# Altium PCB v4.2.1 Embutida.PcbDoc
Units mm, origin at the board's own origin, x right, y up, seen from the top; angles counter-clockwise.
Board outline 100.32 x 66.7 mm, 2 copper layers (Top, Bottom); 36 components, 28 nets, 130 pads, 0 vias.
Unrouted connection lines stored in the file: 83.
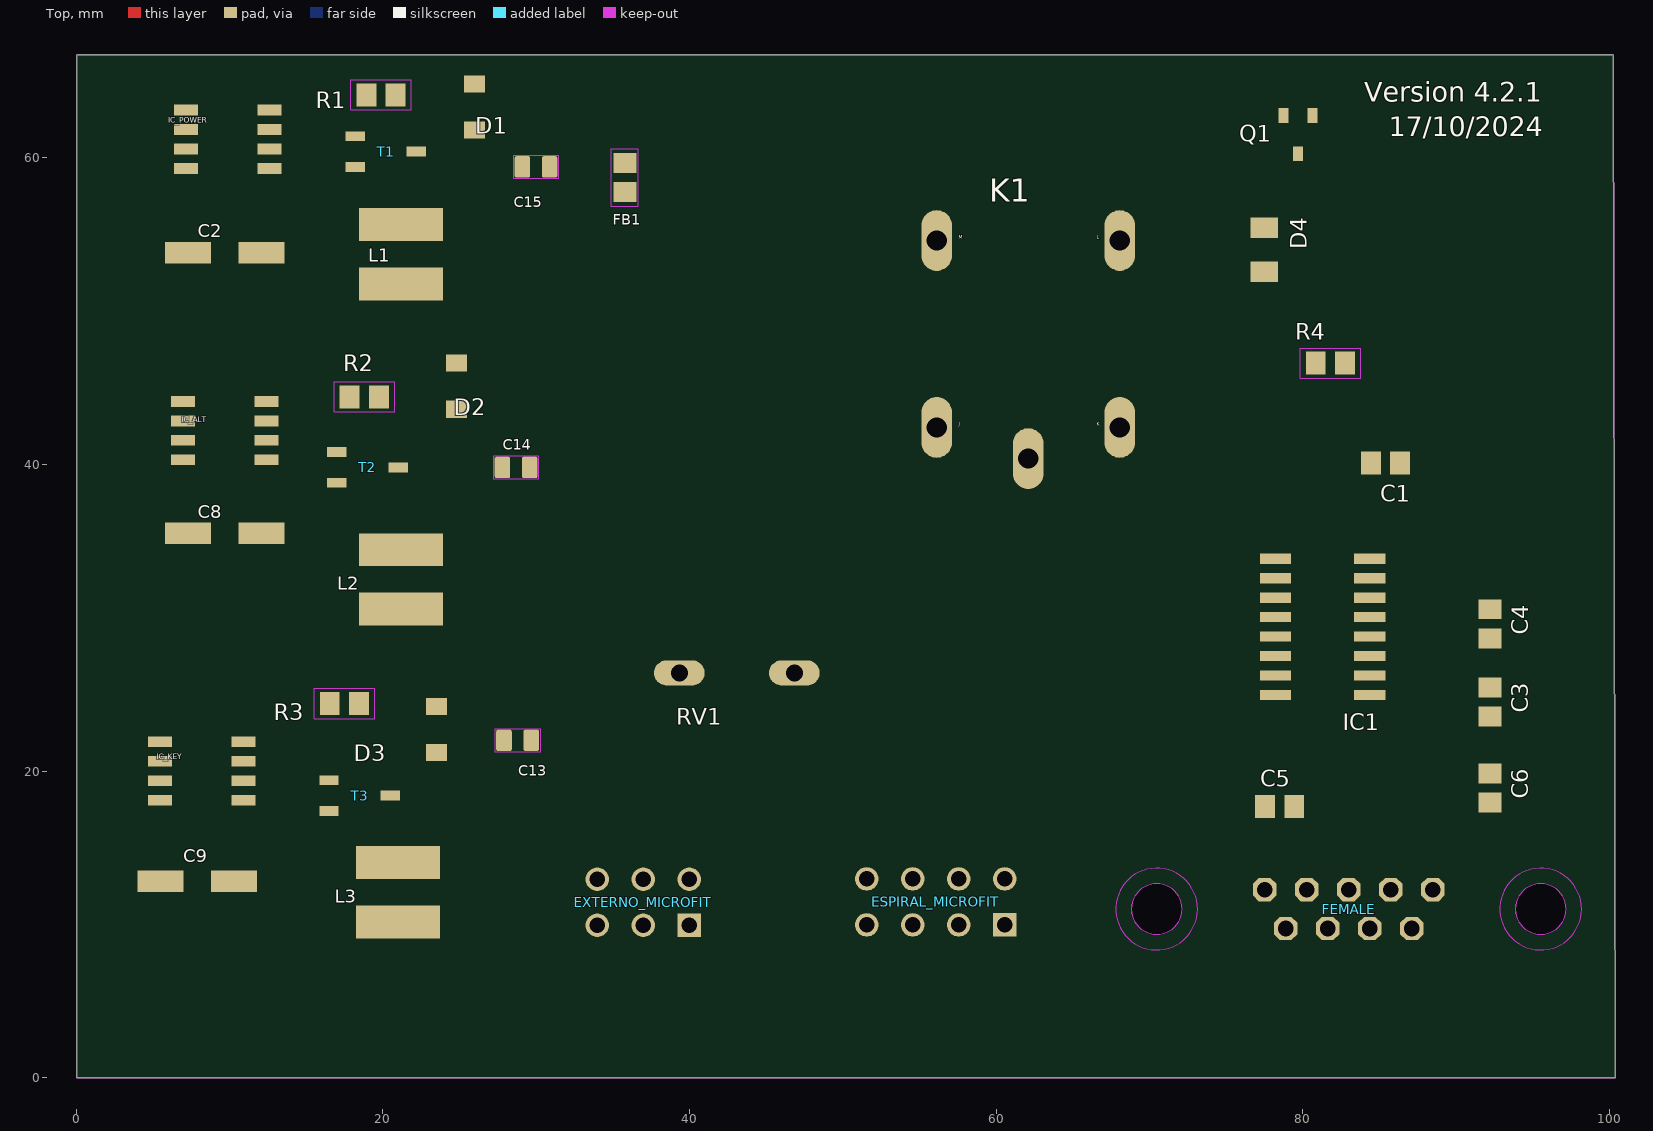
[diagram p0: Top view]
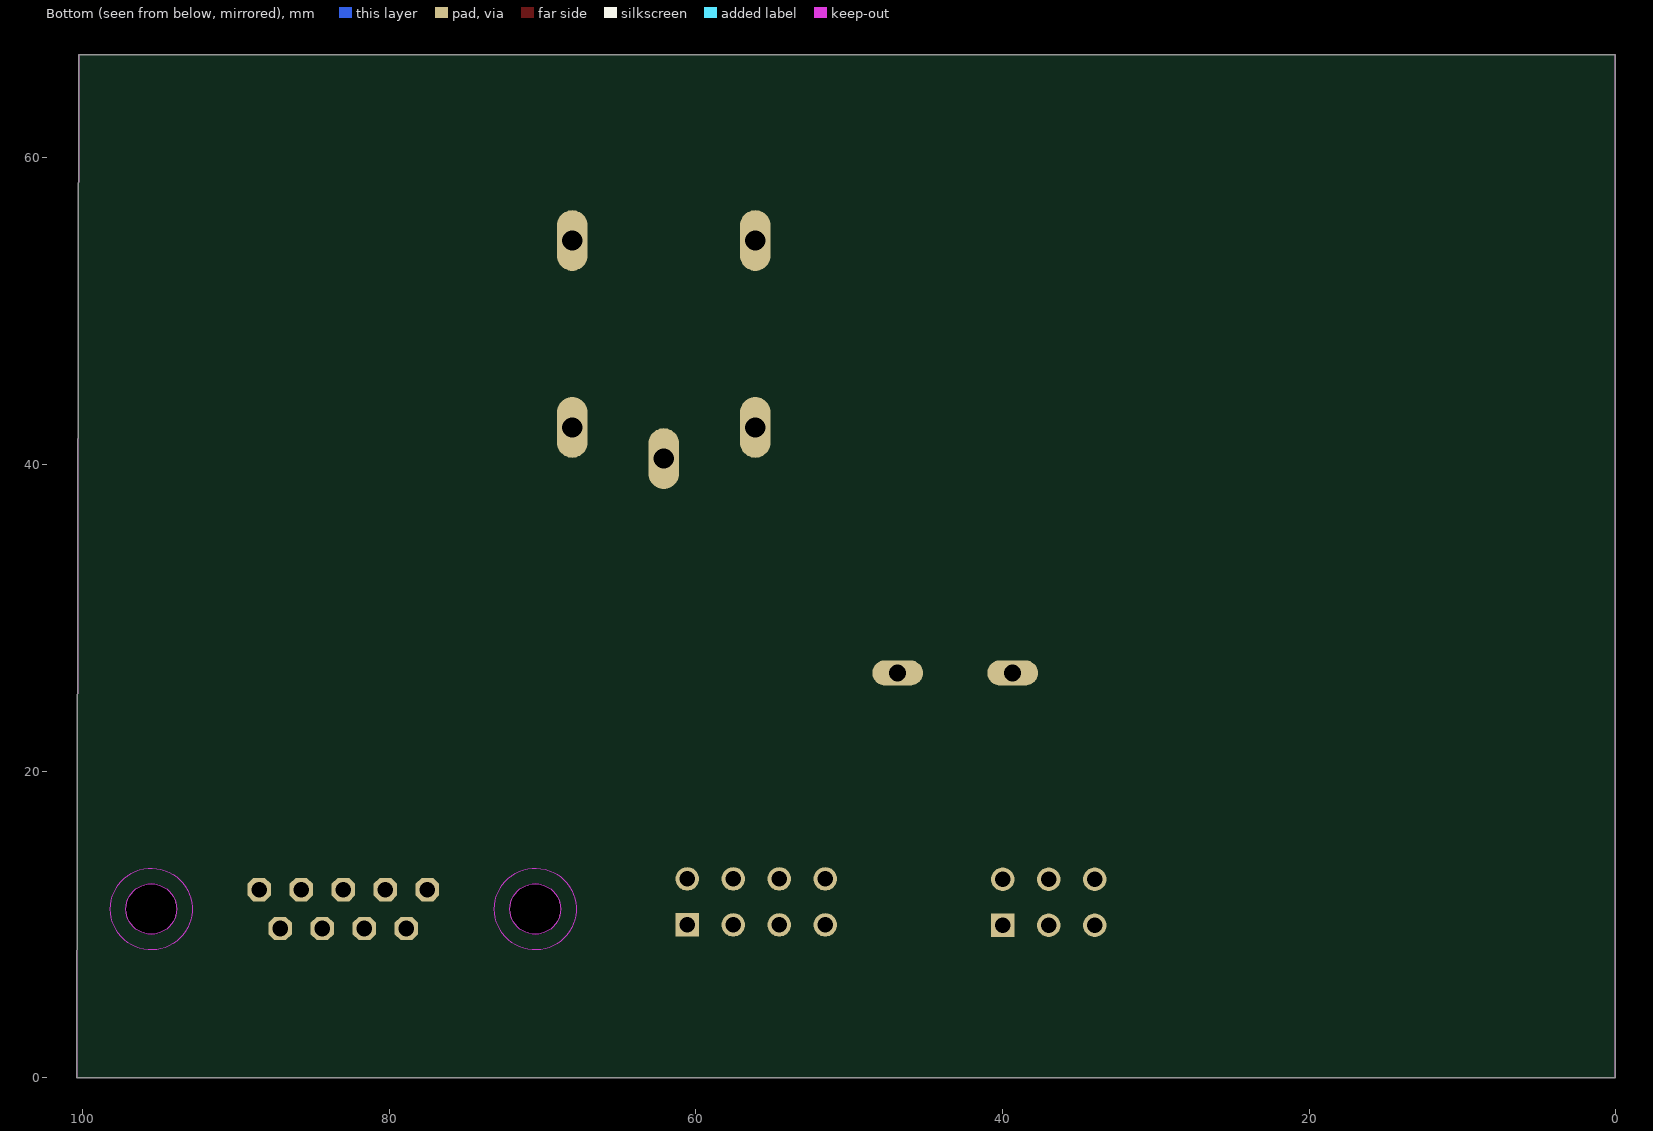
[diagram p1: Bottom view, seen from below]

## Layer stack, top to bottom
Top Solder: solder mask 0.0102, Solder Resist, Dk 3.5
Top: signal copper 0.035
Dielectric 1: dielectric 0.32, FR-4, Dk 4.8
Bottom: signal copper 0.035
Bottom Solder: solder mask 0.0102, Solder Resist, Dk 3.5

## Board outline
0.056,66.706 0.056,0.006 100.376,0.006 100.256,66.706
cut-out: 70.478,9.349 ccw(c70.478,11) 72.129,11 ccw(c70.478,11) 70.478,12.651 ccw(c70.478,11) 68.827,11 ccw(c70.478,11)
cut-out: 95.522,9.349 ccw(c95.522,11) 97.173,11 ccw(c95.522,11) 95.522,12.651 ccw(c95.522,11) 93.871,11 ccw(c95.522,11)

## Design rules (kind name [scope] priority, off if disabled: settings)
BoardOutlineClearance mdCopperDimension [All] p1: gap=0.254 ignorepadtopadclearanceinfootprint=FALSE except(0: Arc-SplitContinuation Track-SplitContinuation SMDPad-SplitContinuation THPad-SplitContinuation Via-SplitContinuation Fill-SplitContinuation Poly-SplitContinuation Region-SplitContinuation Text-SplitContinuation; 1.016: Poly-OutlineEdge Poly-CavityEdge Poly-CutoutEdge Poly-SplitBarrior)
Clearance "Clearance (Same Net)" [All] p1: gap=0.152 ignorepadtopadclearanceinfootprint=FALSE
Clearance [All] p2: gap=0.152 ignorepadtopadclearanceinfootprint=FALSE
HoleSize "HoleSize_For_NetClass_New Class" [InNetClass('New Class')] p1: absolutevalues=TRUE maxlimit=1 minlimit=1 maxpercent=80.000 minpercent=20.000
HoleSize [All] p2: absolutevalues=TRUE maxlimit=2540 minlimit=0.35 maxpercent=80.000 minpercent=20.000
HoleToHoleClearance mdDrill [All] p1: gap=0.152 allowstackedmicrovias=TRUE
MinimumSolderMaskSliver [All] p1 off: minsoldermaskwidth=0.254
PasteMaskExpansion mlMinCreamFrame [All] p1: expansion=0
PolygonConnect ThermalVias [IsVia] p1: connectstyle=Direct reliefconductorwidth=0.254 reliefentries=4 polygonreliefangle="90 Angle" airgapwidth=0.254
PolygonConnect [All] p2: connectstyle=Relief reliefconductorwidth=0.254 reliefentries=4 polygonreliefangle="90 Angle" airgapwidth=0.254
RoutingVias [All] p1: holewidth=0.35 width=0.756 viastyle="Through Hole" minholewidth=0.35 minwidth=0.756 maxholewidth=2.54 maxwidth=2.54
SolderMaskExpansion mlMinStopFrame [All] p1: expansion=0.102 istentingtop=FALSE
SupplyNets "Schematic Supply Nets" [InNet('GND')] p1: voltage=0.000
Width "Width_For_NetClass_New Class" [InNetClass('New Class')] p1: maxlimit=1 minlimit=0.254 preferedwidth=0.5
Width [All] p2: maxlimit=0.254 minlimit=0.152 preferedwidth=0.152
26 further rules are at their usual default settings.

## Components (designator, comment, footprint, x,y, rotation, side; value= is the part's Value field where it differs from the comment)
C1 "100n" C0805#1 85.4,40.1 r180 top
C2 "22uF/50v" PANASONIC_D 9.7,53.8 r0 top
C3 "100n" C0805#1 92.2,24.5 r270 top
C4 "100n" C0805#1 92.2,29.6 r270 top
C5 "100n" C0805#1 78.5,17.7 r0 top
C6 "100n" C0805#1 92.2,18.9 r270 top
C8 "22uF/50V" PANASONIC_D 9.7,35.5 r0 top
C9 "22uF/50V" PANASONIC_D 7.9,12.8 r0 top
C13 "10uF/50V" C0805#2 28.8,22 r180 top
C14 "10uF/50V" C0805#2 28.7,39.8 r180 top
C15 "10uF/50V" C0805#2 30,59.4 r180 top
D1 "1N5819HW1-7-F" SODFL3518X115N 26,63.3 r90 top
D2 "1N5819HW1-7-F" SODFL3518X115N 24.8,45.1 r90 top
D3 "1N5819HW1-7-F" SODFL3518X115N 23.5,22.7 r90 top
D4 "S1MFL" SODFL3617X108N 77.5,54 r270 top
ESPIRAL_MICROFIT "HEADER_POS8_?43045-0800" 43045-0800 56.062,5.645 r0 top
EXTERNO_MICROFIT "HEADER_POS6_?43045-0600" 43045-0600 37,5.622 r0 top
FB1 "1A" 0805 35.8,58.7 r270 top
FEMALE "F09H" F09H 83,11 r180 top
IC1 "MAX232" SO16 81.3,29.4 r90 top
IC_ALT "XL1509-3.3E1" SOIC127P600X175-8N 9.7,42.2 r180 top
IC_KEY "XL1509-3.3E1" SOIC127P600X175-8N 8.2,20 r180 top
IC_POWER "XL1509-3.3E1" SOIC127P600X175-8N 9.9,61.2 r180 top
K1 "G5LE" G5LE 62.1,49.9 r90 top
L1 "47uH" SDE0604A-470M 21.2,53.7 r270 top
L2 "47uH" SDE0604A-470M 21.2,32.5 r90 top
L3 "47uH" SDE0604A-470M 21,12.1 r90 top
Q1 "BC847" BC847 79.7,61.5 r270 top
R1 "100" R0805 19.9,64.1 r180 top
R2 "100" R0805 18.8,44.4 r180 top
R3 "100" R0805 17.5,24.4 r180 top
R4 "10k" R0805 81.8,46.6 r0 top
RV1 "MOV-14D471K" MOV14D471K 43.1,26.4 r180 top
T1 "TRIMPOT 10K" TRIMPOT 18.7,61.9 r180 top
T2 "TRIMPOT 10K" TRIMPOT 17.5,41.3 r180 top
T3 "TRIMPOT 10K" TRIMPOT 17,19.9 r180 top

## Footprints (in the part's own frame and the unit in brackets; to place one, negate y for a bottom-side part, rotate by r counter-clockwise, add the part's x,y. Pads: shape width x height; smd on the part's side, far side on the other; paste and mask are expansions set on the pad)
0805 [mm] "0805"
  rect 1.3x1.5 smd: 1(-0.95,0) 2(0.95,0)
  Top keep-out lines w0.051: 1.873,-0.883 -1.873,-0.883 -1.873,0.883 1.873,0.883 1.873,-0.883
43045-0600 [mm] "43045-0600"
  rect 1.53x1.53 / inner round 1.414 / far side rect 1.53x1.53 hole 1.02: P$1(3,4.32)
  round 1.53 hole 1.02: P$2(0,4.32) P$3(-3,4.32) P$4(3,7.32) P$5(0,7.32) P$6(-3,7.32)
43045-0800 [mm] "43045-0800"
  rect 1.53x1.53 / inner round 1.414 / far side rect 1.53x1.53 hole 1.02: P$1(4.5,4.32)
  round 1.53 hole 1.02: P$2(1.5,4.32) P$3(-1.5,4.32) P$4(-4.5,4.32) P$5(4.5,7.32) P$6(1.5,7.32) P$7(-1.5,7.32) P$8(-4.5,7.32)
BC847 [mm] "BC847"
  rect 0.95x0.65 smd: 1(-1.25,-0.95) 2(-1.25,0.95) 3(1.25,0)
C0805#1 [mm] "C0805"
  rect 1.3x1.5 smd: 1(-0.95,0) 2(0.95,0)
C0805#2 [mm] "C0805"
  rrect25% 1.016x1.397 smd: 1(-0.889,0) 2(0.889,0)
  Top keep-out region: -1.46,-0.762 -1.461,0.762 1.46,0.762 1.461,-0.762
F09H [mil] "F09H"
  oct 60x60 / inner round 55.43 / far side oct 60x60 hole 40: 1(-216,-50) 2(-108,-50) 3(0,-50) 4(108,-50) 5(216,-50) 6(-162,50) 7(-54,50) 8(54,50) 9(162,50)
  Top keep-out circle w0: c-493,0 r105
  Top keep-out circle w0: c493,0 r105
  Bottom keep-out circle w0: c-493,0 r105
  Bottom keep-out circle w0: c493,0 r105
G5LE [mil] "G5LE"
  oval 156x78 hole 52: 1(-295,-235) 2(-295,235) O(185,235) P(-375,0) S(185,-235)
MOV14D471K [mm] "MOV14D471K"
  oval 3.3x1.65 hole 1.1: 1(-3.75,0) 2(3.75,0)
PANASONIC_D [mm] "PANASONIC_D"
  rect 3x1.4 smd: +(2.4,0) -(-2.4,0)
R0805 [mm] "R0805"
  rect 1.3x1.5 smd: 1(-0.95,0) 2(0.95,0)
  Top keep-out lines w0.051: 1.973,0.983 -1.973,0.983 -1.973,-0.983 1.973,-0.983 1.973,0.983
SDE0604A-470M [mm] "SDE0604A-470M"
  rect 2.15x5.5 smd: 1(-1.931,0) 2(1.931,0)
SO16 [mil] "SO16"
  rect 26x80 smd: 1(-175,-121) 2(-125,-121) 3(-75,-121) 4(-25,-121) 5(25,-121) 6(75,-121) 7(125,-121) 8(175,-121) 9(175,121) 10(125,121) 11(75,121) 12(25,121) 13(-25,121) 14(-75,121) 15(-125,121) 16(-175,121)
SODFL3518X115N [mm] "SODFL3518X115N"
  rect 1.12x1.37 smd: 1(-1.5,0) 2(1.5,0)
SODFL3617X108N [mm] "SODFL3617X108N"
  rect 1.34x1.8 smd: A(1.43,0) C(-1.43,0)
SOIC127P600X175-8N [mm] "SOIC127P600X175-8N"
  rect 1.55x0.7 smd: 1(-2.725,1.905) 2(-2.725,0.635) 3(-2.725,-0.635) 4(-2.725,-1.905) 5(2.725,-1.905) 6(2.725,-0.635) 7(2.725,0.635) 8(2.725,1.905)
TRIMPOT [mm] "TRIMPOT"
  rect 1.27x0.635 smd: OUT(0.5,0.5) VCC1(-3.5,1.5) VCC2(0.5,2.5)

## Part data
C1 C3 C4 C5 C6: library part C-EUC0805, "CAPACITOR, European symbol", MPN=C0805C104K8RACAUTO, DeviceName=C0805, DeviceSetName=C-EU, GateName_1=G$1, LibraryName=rcl@1, POPULARITY=88, SPICEPREFIX=C, SymbolName_1=C-EU
C2 C8 C9: library part CPOL-EUD, "POLARIZED CAPACITOR, European symbol", MPN=EEH-ZA1H220P, +=+, DeviceName=D, DeviceSetName=CPOL-EU, GateName_1=G$1, LibraryName=rcl, POPULARITY=16, SPICEPREFIX=C, SymbolName_1=CPOL
C13 C14 C15: library part C*-0805, "Ceramic Capacitors", MPN=C2012X5R1H106K125AC, DeviceName=-0805, DeviceSetName=C*, GateName_1=C, LibraryName=discrete, SymbolName_1=C
D1 D2 D3: "1N5819 Schottky Diode 40V 1A SOD123F   Source:  Datasheet", Manufacturer_Name="Diodes Inc.", MPN="1N5822 SS34", ARROW_PART_NUMBER=1N5819HW1-7-F, ARROW_PRICE-STOCK=https://www.arrow.com/en/products/1n5819hw1-7-f/diodes-incorporated?region=nac, DeviceSetName=1N5819HW1-7-F, GateName_1=G$1, Height=1.15mm, LibraryName=1N5819HW1-7-F, Manufacturer_Part_Number=1N5819HW1-7-F, MOUSER_PART_NUMBER=621-1N5819HW1-7-F, MOUSER_PRICE-STOCK=https://www.mouser.co.uk/ProductDetail/Diodes-Incorporated/1N5819HW1-7-F?qs=60RJRzIpcl9ACQG7Zn63jQ%3D%3D, SymbolName_1=1N5819HW1-7-F
D4: "Diode Standard 1000V 1A Surface Mount SOD-123F   Check availability", Package="SOD-123F ON Semiconductor", Availability="In Stock", CHECK_PRICES=https://www.snapeda.com/parts/S1MFL/Onsemi/view-part/?ref=eda, DeviceSetName=S1MFL, GateName_1=G$1, LibraryName=S1MFL, MF=onsemi, MP=S1MFL, Price=None, PURCHASE-URL=https://www.snapeda.com/api/url_track_click_mouser/?unipart_id=7151124&manufacturer=onsemi&part_name=S1MFL&search_term=None, SNAPEDA_LINK=https://www.snapeda.com/parts/S1MFL/Onsemi/view-part/?ref=snap, SymbolName_1=S1MFL
ESPIRAL_MICROFIT: "Molex - Micro-Fit 3.0 Series connector,  3.00mm (0.118\") pitch header, 8 positions.", MPN=43045-0800, DeviceName=43045-0800, DeviceSetName=HEADER_POS8_?, GateName_1=G$1, LibraryName="con-molex-micro-fit-3_0 (1)", SymbolName_1=HEADER_POS8
EXTERNO_MICROFIT: "Molex - Micro-Fit 3.0 Series connector,  3.00mm (0.118\") pitch header, 6 positions.", MPN=43045-0600, DeviceName=43045-0600, DeviceSetName=HEADER_POS6_?, GateName_1=G$1, LibraryName="con-molex-micro-fit-3_0 (1)", SymbolName_1=HEADER_POS6
FB1: library part FERRITE0805, "Ferrite Bead   0603 MMZ1608B121C - 120 Ohm, 600mA Ferrite Chip - Digikey: 445-2164-1-ND  BK1608HW121-T - 120 Ohm, 600mA Ferrite Chip - Digikey: 587-1876-2-ND       0805 HZ0805B272R-10 - 2.7K Ohm @ 100MHz, 200mA 0.8 Ohm DC Resistance - Digikey: 240-2504-1-ND (see also Murata BLM21BD272SN1L)", MPN=BLM21AG121SN1D, DeviceName=0805, DeviceSetName=FERRITE, GateName_1=G$1, LibraryName=microbuilder, SymbolName_1=FERRITE
FEMALE: "SUB-D", MPN="FEMALE DR9", DeviceName=H, DeviceSetName=F09, GateName_1=G$1, LibraryName=con-subd, MF=MF, OC_FARNELL=unknown, OC_NEWARK=unknown, POPULARITY=0, SymbolName_1=F09
IC1: library part MAX232ECWES, "RS232 TRANSEIVER", MPN=MAX3232CSE+, DeviceName=S, DeviceSetName=MAX232ECWE, GateName_1=G$1, GateName_2=P, GND=GND, LibraryName=maxim-6b, SymbolName_1=MAX232, SymbolName_2=VCC-GND, VCC=VCC
IC_ALT IC_KEY IC_POWER: "40V 2A SOP-8_150mil DC-DC Converters RoHS   Source:  Datasheet", Manufacturer_Name=XLSEMI, MPN=XL1509-ADJE1, ARROW_PART_NUMBER=ARROW_PART_NUMBER, ARROW_PRICE-STOCK=ARROW_PRICE-STOCK, DeviceSetName=XL1509-3.3E1, GateName_1=G$1, Height=1.75mm, LibraryName=XL1509-3.3E1, Manufacturer_Part_Number=XL1509-3.3E1, MOUSER_PART_NUMBER=MOUSER_PART_NUMBER, MOUSER_PRICE-STOCK=MOUSER_PRICE-STOCK, SymbolName_1=XL1509-3.3E1
K1: "RELAY   1 x switch, 10 A/120 V AC, 8 A/30 V DC, Omron", Manufacturer=MANUFACTURER, MPN=MPN, DeviceSetName=G5LE, GateName_1=1, GateName_2=2, LibraryName=relay, PART=K1, PART_STATUS=PART_STATUS, POPULARITY=13, SymbolName_1=K, SymbolName_2=U
L1 L2 L3: library part INDUCTOR, "A very specific inductor", MPN=SDE0604A-470M, DeviceSetName=INDUCTOR, GateName_1=G$1, LibraryName=passives, SymbolName_1=INDUCTOR
Q1: "Epitaxial Planar NPN transistor   Source:  Datasheet", Manufacturer_Name=KEC, ARROW_PART_NUMBER=ARROW_PART_NUMBER, ARROW_PRICE-STOCK=ARROW_PRICE-STOCK, DeviceSetName=BC847, GateName_1=G$1, Height=1.3mm, LibraryName=BC847, Manufacturer_Part_Number=BC847, MOUSER_PART_NUMBER=MOUSER_PART_NUMBER, MOUSER_PRICE-STOCK=MOUSER_PRICE-STOCK, SymbolName_1=BC847
R1 R2 R3 R4: library part R-EU_R0805, "RESISTOR, European symbol", MPN=RA73F2A100RBTDF, DeviceName=R0805, DeviceSetName=R-EU_, GateName_1=G$1, LibraryName=rcl, POPULARITY=86, SPICEPREFIX=R, SymbolName_1=R-EU
RV1: "Bourns MOV-14D Series Metal Oxide Varistor 430pF 50A, Clamping 775V, Varistor 470V   Source:  Datasheet   Check availability", Package="Disc-14 Bourns", Availability="In Stock", CHECK_PRICES=https://www.snapeda.com/parts/MOV-14D471K/Bourns/view-part/?ref=eda, DeviceSetName=MOV-14D471K, GateName_1=G$1, LibraryName=MOV-14D471K, MF=Bourns, MP=MOV-14D471K, Price=None, SNAPEDA_LINK=https://www.snapeda.com/parts/MOV-14D471K/Bourns/view-part/?ref=snap, SymbolName_1=MOV-14D471K
T1 T2 T3: library part TRIMPOT, MPN=EVM3ESX50B14, DeviceSetName=TRIMPOT, GateName_1=G$1, LibraryName=TRIMPOT, SymbolName_1=TRIMPOT

## Free pads (board coordinates)
  round 3.302 hole 3.302 unplated: MH1(95.522,11) MH2(70.478,11)

## Nets (pads, with @x,y where several pads share a name; then routed paths per layer and width w, separated by ;. In a path a pad name is that pad's centre, name@x,y a point inside that pad or via, vN(x,y) a via of type N, cw(c..) or ccw(c..) an arc to the next point about the centre after c; other vN are vias at no path point)
24V: C2.+ EXTERNO_MICROFIT.P$4 IC_POWER.1 K1.P RV1.2
ALT: C14.2 ESPIRAL_MICROFIT.P$2 L2.1 T2.VCC1 T2.VCC2
ALT_IN: C8.+ EXTERNO_MICROFIT.P$5 IC_ALT.1
COM: ESPIRAL_MICROFIT.P$7 R4.1
GND: C1.2 C2.- C5.1 C8.- C9.- C13.1 C14.1 C15.1 D1.2 D2.2 D3.2 ESPIRAL_MICROFIT.P$4 EXTERNO_MICROFIT.P$3 FEMALE.5 IC1.15 IC_ALT.5 IC_ALT.6 IC_ALT.7 IC_ALT.8 IC_KEY.5 IC_KEY.6 IC_KEY.7 IC_KEY.8 IC_POWER.5 IC_POWER.6 IC_POWER.7 IC_POWER.8 Q1.1 R1.1 R2.1 R3.1 RV1.1
KEY: C13.2 ESPIRAL_MICROFIT.P$5 L3.1 T3.VCC1 T3.VCC2
KEY_IN: C9.+ EXTERNO_MICROFIT.P$6 IC_KEY.1
NetC1_1: C1.1 IC1.6
NetC3_1: C3.1 IC1.3
NetC3_2: C3.2 IC1.1
NetC4_1: C4.1 IC1.5
NetC4_2: C4.2 IC1.4
NetC6_1: C6.1 IC1.2
NetD1_1: D1.1 IC_POWER.2 L1.2
NetD2_1: D2.1 IC_ALT.2 L2.2
NetD3_1: D3.1 IC_KEY.2 L3.2
NetD4_A: D4.A K1.1 Q1.3
NetFEMALE_2: FEMALE.2 IC1.14
NetFEMALE_3: FEMALE.3 IC1.13
NetIC_ALT_3: IC_ALT.3 R2.2 T2.OUT
NetIC_KEY_3: IC_KEY.3 R3.2 T3.OUT
NetIC_POWER_3: IC_POWER.3 R1.2 T1.OUT
NetQ1_2: Q1.2 R4.2
PSM: EXTERNO_MICROFIT.P$1 K1.S
RX: ESPIRAL_MICROFIT.P$6 IC1.12
TX: ESPIRAL_MICROFIT.P$3 IC1.11
VCC: C5.2 C6.2 ESPIRAL_MICROFIT.P$8 FB1.2 IC1.16
VCC_PRE: C15.2 D4.C K1.2 L1.1 T1.VCC1 T1.VCC2
pads on no net: ESPIRAL_MICROFIT.P$1 EXTERNO_MICROFIT.P$2 FB1.1 FEMALE.1 FEMALE.4 FEMALE.6 FEMALE.7 FEMALE.8 FEMALE.9 IC1.7 IC1.8 IC1.9 IC1.10 IC_ALT.4 IC_KEY.4 IC_POWER.4 K1.O

## Keep-outs
Keep-Out Layer:
  the board outline again, w0

## Silkscreen, mask and mechanical layers (free items; w line width, h text height)
Top Overlay:
  text "Version 4.2.1" at 84.004,63.639 h1.28
  text "17/10/2024" at 85.597,61.389 h1.28
  text "M" at 57.585,54.713 h0.22
  text "L" at 66.585,54.713 h0.22
  text "J" at 57.585,42.513 h0.22
  text "K" at 66.585,42.513 h0.22
Dimension:
  the board outline again, w0
tPlace:
  lines w0.051: 76.528,18.684 76.528,18.683 ; 91.217,26.473 91.217,22.527 93.185,22.527 93.185,26.474 91.216,26.474 ; 91.217,31.571 91.217,27.625 93.185,27.625 93.185,31.572 91.216,31.572 ; 76.528,18.683 80.473,18.683 80.473,16.716 76.528,16.716 76.528,18.683 ; 15.529,23.416 19.474,23.416 19.474,25.383 15.529,25.383 15.529,23.416 ; 16.829,43.417 20.774,43.417 20.774,45.384 16.829,45.384 16.829,43.417 ; 17.928,63.117 21.873,63.117 21.873,65.084 17.928,65.084 17.928,63.117 ; 79.828,45.617 83.773,45.617 83.773,47.584 79.828,47.584 79.828,45.617 ; 83.429,39.117 87.374,39.117 87.374,41.084 83.429,41.084 83.429,39.117 ; 91.217,16.925 91.217,20.871 91.216,20.872 93.185,20.872 93.185,16.925 91.217,16.925
  text "5V" at 3.598,61.39 h0.86
  text "3.3V" at 2.413,42.203 h0.86
  text "3.3V" at 0.899,19.967 h0.86

## Text inside footprints (layer, text, board x,y; h text height)
FEMALE: tPlace "1" at 90.62,12.905 h1.08 r180; tPlace "5" at 76.015,12.905 h1.08 r180; tPlace "9" at 76.015,10.365 h1.08 r180; tPlace "6" at 90.62,10.365 h1.08 r180; tPlace "2,54" at 68.014,8.46 h1.08 r270; tPlace "F09" at 90.62,2.491 h1.08 r180